# EAGLE board stepperdriver (EAGLE 6.4)

Size 100 x 80 mm. Coordinates in mm from the lower left corner, seen from the top.
Outline: 0,0 100,0 100,80 0,80 0,0
Copper layers (1*16): Top 0.035mm / dielectric 1.5mm / Bottom 0.035mm
Design rules "default *": minimum track width 10mil, minimum drill 24mil, track to track 8mil, track to pad 8mil, pad to pad 8mil, via to via 8mil, smd to smd 8mil, copper to edge 40mil, drill to drill 8mil, minimum pad ring 10mil, minimum via ring 8mil, stop-mask expansion 4mil, vias tented up to drill 0mil, thermal gap 10mil
Net classes: 0 default: width 0.203 mm; 1 Supply: width 1.016 mm; 2 Motor: width 1.016 mm

## Footprints (pad centres in the part's own frame; a part is rotated, then mirrored left to right if it is on the bottom)
C050-035X075 = drill 0.813 octagon: 1 -2.54,0; 2 2.54,0
E5-13 = drill 1.016 pad 2.54: + -2.54,0 | drill 1.016 pad 2.54 octagon: - 2.54,0
DO201-15 = drill 1.499 long: A 7.62,0; C -7.62,0
DIL20 = drill 0.813 long: 1 -11.43,-3.81; 2 -8.89,-3.81; 3 -6.35,-3.81; 4 -3.81,-3.81; 5 -1.27,-3.81; 6 1.27,-3.81; 7 3.81,-3.81; 8 6.35,-3.81; 9 8.89,-3.81; 10 11.43,-3.81; 11 11.43,3.81; 12 8.89,3.81; 13 6.35,3.81; 14 3.81,3.81; 15 1.27,3.81; 16 -1.27,3.81; 17 -3.81,3.81; 18 -6.35,3.81; 19 -8.89,3.81; 20 -11.43,3.81
MULTIWATT-15 = drill 1.2 long: 1 -8.89,-7.62; 2 -7.62,-2.54; 3 -6.35,-7.62; 4 -5.08,-2.54; 5 -3.81,-7.62; 6 -2.54,-2.54; 7 -1.27,-7.62; 8 0,-2.54; 9 1.27,-7.62; 10 2.54,-2.54; 11 3.81,-7.62; 12 5.08,-2.54; 13 6.35,-7.62; 14 7.62,-2.54; 15 8.89,-7.62
78XXS = drill 1.016 long: GND 0,-2.54; IN -2.54,-2.54; OUT 2.54,-2.54
0207/10 = drill 0.813 octagon: 1 -5.08,0; 2 5.08,0
RTRIM64W = drill 0.61: 1 1.27,-2.54; 2 1.27,0; 3 1.27,2.54
0411/15 = drill 0.914 octagon: 1 -7.62,0; 2 7.62,0
2POL254 = drill 1.2 long: 1 -1.27,0; 2 1.27,0
1751248 = drill 1.1 pad 1.7: 1 -1.75,-0.1; 2 1.75,-0.1
1751264 = drill 1.1 pad 1.7: 1 -5.25,-0.1; 2 -1.75,-0.1; 3 1.75,-0.1; 4 5.25,-0.1

## Placement (x,y rotation side)
C1  330n  [C050-035X075]  12.7,72.39 0 top
C2  100n  [C050-035X075]  26.67,77.47 0 top
C3  3.3n  [C050-035X075]  27.94,21.59 0 top
C4  1m  [E5-13]  43.18,72.39 0 top
C5  100n  [C050-035X075]  60.96,53.34 90 top
C6  100n  [C050-035X075]  6.35,76.2 0 top
D1  SB320  [DO201-15]  31.75,38.1 90 top
D2  SB320  [DO201-15]  25.4,38.1 90 top
D3  SB320  [DO201-15]  19.05,38.1 90 top
D4  SB320  [DO201-15]  12.7,38.1 90 top
D5  SB320  [DO201-15]  31.75,58.42 90 top
D6  SB320  [DO201-15]  25.4,58.42 90 top
D7  SB320  [DO201-15]  19.05,58.42 90 top
D8  SB320  [DO201-15]  12.7,58.42 90 top
IC1  L297  [DIL20]  49.53,31.75 180 top
IC2  L298  [MULTIWATT-15]  46.99,58.42 0 top
IC3  [78XXS]  16.51,79.38 0 top
R1  10k  [0207/10]  24.13,26.67 180 top
R2  10k  [0207/10]  63.5,25.4 0 top
R3  10k  [0207/10]  66.04,22.86 0 top
R4  10k  [0207/10]  54.61,24.13 0 top
R5  10k  [0207/10]  57.15,21.59 0 top
R6  10k  [0207/10]  43.18,39.37 0 top
R7  11k  [0207/10]  8.89,26.67 0 top
R8  1k  [RTRIM64W]  7.62,21.59 90 top
R9  22k  [0207/10]  35.56,25.4 0 top
R13  0.51  [0411/15]  45.72,44.45 0 top
R14  0.51  [0411/15]  25.4,71.12 0 top
X1  [2POL254]  55.88,17.78 270 top
X2  1751248  [1751248]  5.08,69.85 270 top
X3  1751264  [1751264]  5.08,55.88 270 top
X4  [2POL254]  40.64,19.05 270 top
X5  [2POL254]  45.72,19.05 270 top
X6  [2POL254]  50.8,17.78 270 top
X7  [2POL254]  60.96,17.78 270 top
X8  [2POL254]  35.56,20.32 270 top

## Library data of the parts
C1-C6 R1-R9 R13 R14 = resistor
D1-D8 = diode
IC1 = st-microelectronics; MPN: L297/1; OC_FARNELL: 1094209; OC_NEWARK: 56P8258
IC2 = st-microelectronics; MPN: L298N; OC_FARNELL: 1589425; OC_NEWARK: 32M1527
IC3 = v-reg
X1 X4-X8 = con-phoenix-254; OC_FARNELL: unknown; OC_NEWARK: unknown
X2 = con-phoenix-350; OC_FARNELL: unknown; OC_NEWARK: unknown
X3 = con-phoenix-350; MPN: 1751264; OC_FARNELL: unknown; OC_NEWARK: 10R0934

## Nets
GND [Supply]: C1.2 C2.2 C3.2 C4.- C5.2 C6.2 D5.A D6.A D7.A D8.A IC1.2 IC2.8 IC3.GND R8.1 R13.1 R14.1 X1.2 X2.2 X4.2 X5.2 X6.2 X7.2 X8.2
N$1: IC1.9 IC2.12
N$2: IC1.7 IC2.10
N$3: IC1.5 IC2.6
N$4: IC1.8 IC2.11
N$5: IC1.6 IC2.7
N$7: IC1.4 IC2.5
N$9 [Motor]: IC1.13 IC2.15 R13.2
N$11 [Motor]: IC1.14 IC2.1 R14.2
N$12: C3.1 IC1.16 R9.1
N$13: IC1.19 R2.1 X1.1
N$14: IC1.10 R6.1 X8.1
N$16: IC1.11 R1.1 X4.1
N$17: IC1.17 R4.1 X5.1
N$18: IC1.18 R5.1 X6.1
N$19: IC1.20 R3.1 X7.1
N$23: R7.1 R8.3
N$24: IC1.15 R8.2
O1 [Motor]: D1.A D5.C IC2.2 X3.1
O2 [Motor]: D2.A D6.C IC2.3 X3.2
O3 [Motor]: D3.A D7.C IC2.13 X3.3
O4 [Motor]: D4.A D8.C IC2.14 X3.4
VCC: C2.1 C5.1 IC1.12 IC2.9 IC3.OUT R1.2 R2.2 R3.2 R4.2 R5.2 R6.2 R7.2 R9.2
VIN [Supply]: C1.1 C4.+ C6.1 D1.C D2.C D3.C D4.C IC2.4 IC3.IN X2.1

## Tracks (layer width: path | path; a pad name or v marks a point on that pad's centre or on a via)
GND  (22 unrouted)
N$1  (1 unrouted)
N$2  (1 unrouted)
N$3  (1 unrouted)
N$4  (1 unrouted)
N$5  (1 unrouted)
N$7  (1 unrouted)
N$9  (2 unrouted)
N$11  (2 unrouted)
N$12  (2 unrouted)
N$13  (2 unrouted)
N$14  (2 unrouted)
N$16  (2 unrouted)
N$17  (2 unrouted)
N$18  (2 unrouted)
N$19  (2 unrouted)
N$23  (1 unrouted)
N$24  (1 unrouted)
O1  (3 unrouted)
O2  (3 unrouted)
O3  (3 unrouted)
O4  (3 unrouted)
VCC  (12 unrouted)
VIN  (9 unrouted)